# EAGLE board example2 (EAGLE 6.2)

No outline drawn. Coordinates in mm, seen from the top.
Copper layers (1*16): Top 0.035mm / dielectric 1.5mm / Bottom 0.035mm
Design rules: minimum track width 10mil, minimum drill 24mil, track to track 8mil, track to pad 8mil, pad to pad 8mil, via to via 8mil, smd to smd 8mil, copper to edge 40mil, drill to drill 8mil, minimum pad ring 10mil, minimum via ring 8mil, stop-mask expansion 4mil, vias tented up to drill 0mil, thermal gap 10mil

## Footprints (pad centres in the part's own frame; a part is rotated, then mirrored left to right if it is on the bottom)
DE_X = smd 7.874 x 5.969: D1 14.592,3.556; D2 14.592,-3.556 | smd 7.874 x 4.953: G1 -14.592,3.556; G2 -14.592,-3.556 | smd 7.874 x 3.683: SD1 14.592,9.423; SD2 14.605,-9.449; SG1 -14.592,9.449; SG2 -14.592,-9.449

## Placement (x,y rotation side)
E$1  [DE_X]  40.64,20.32 0 top

## Library data of the parts
E$1 = transistor-power